# Altium PCB TestBoard.PcbDoc (part 3 of 3)
Units mm, origin at the board's own origin, x right, y up, seen from the top; angles counter-clockwise.
Board outline 300 x 186 mm, 4 copper layers (Top Layer, Mid-Layer 2, Mid-Layer 1, Bottom Layer); 136 components, 264 nets, 1109 pads, 450 vias.
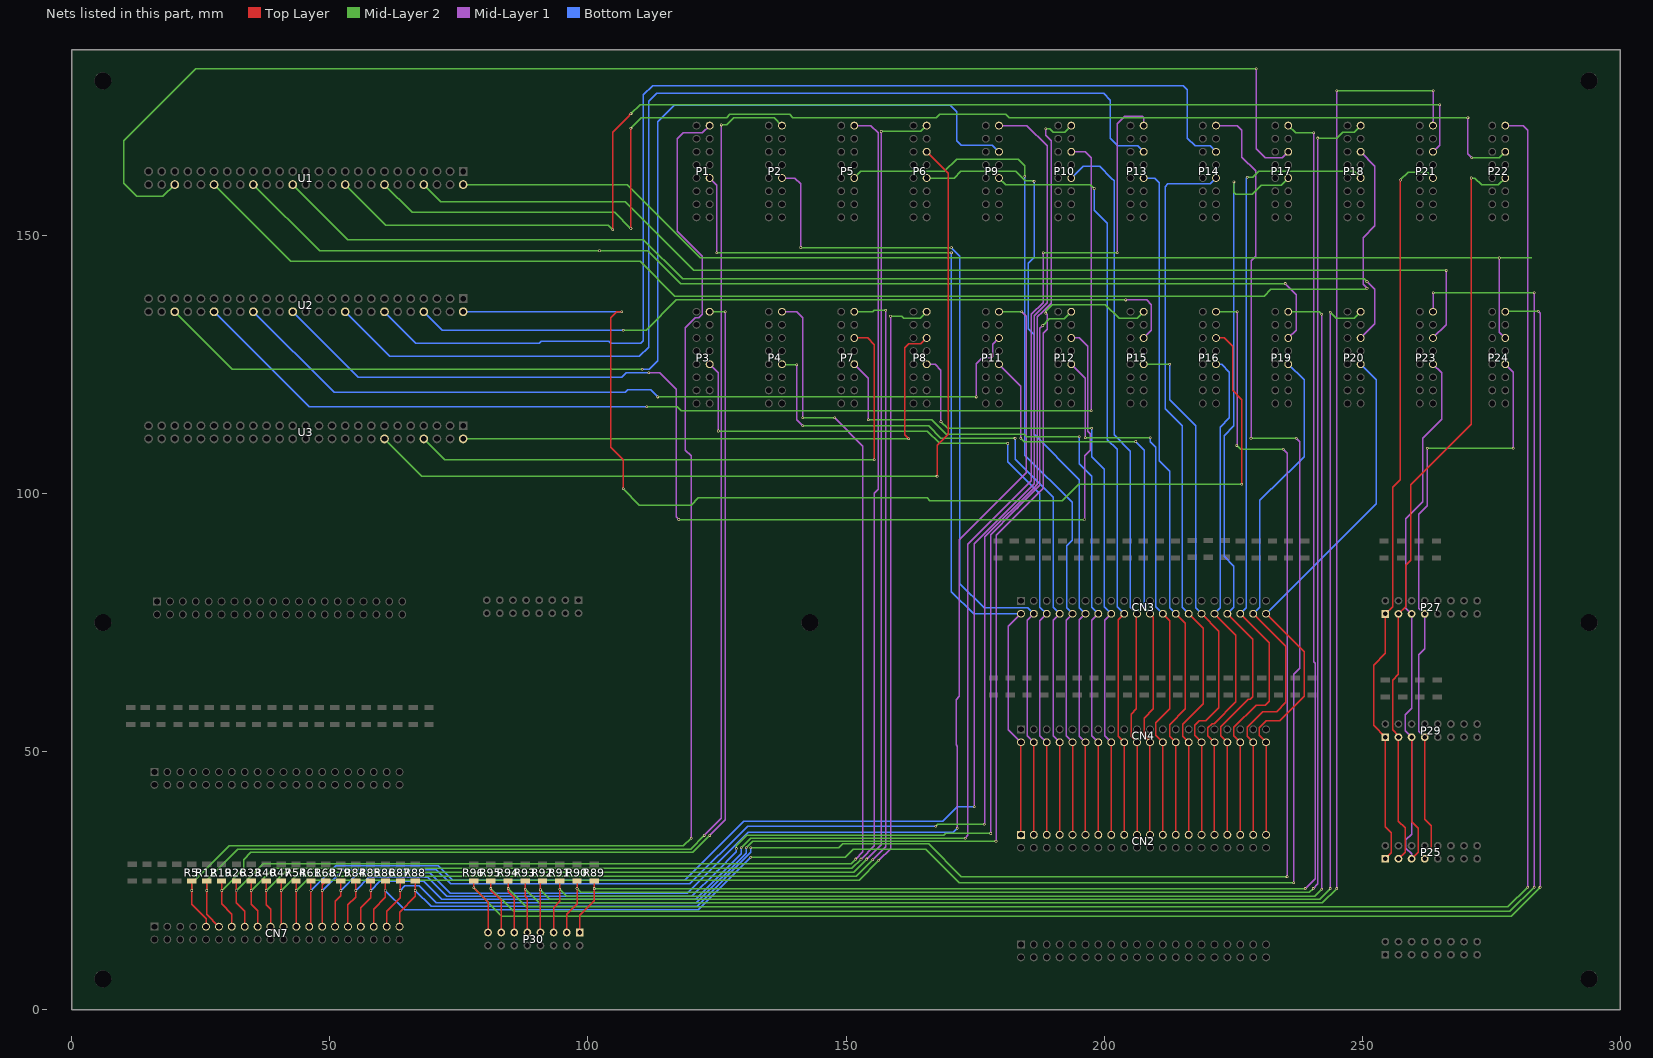
[diagram p5: the nets of this part, all layers, seen from the top]

## Via types
v1: diameter 0.508, hole 0.305, Top Layer to Bottom Layer, tented both sides, 450 vias

## Nets (pads, with @x,y where several pads share a name; then routed paths per layer and width w, separated by ;. In a path a pad name is that pad's centre, name@x,y a point inside that pad or via, vN(x,y) a via of type N, cw(c..) or ccw(c..) an arc to the next point about the centre after c; other vN are vias at no path point) (continued)
TXD0_RF6: P6.6 U3.14 | length 175.5
  Top Layer w0.254: P6.6@165.62,166.243 169.799,162.064 169.799,146.685 169.799,111.506 167.64,109.347 v1(167.64,103.378)
  Mid-Layer 2 w0.254: U3.14@60.579,110.617 67.818,103.378 v1(167.64,103.378)
TXD0_RF7: P7.6 U3.8 | length 115.7
  Top Layer w0.254: P7.6@151.603,130.175 154.178,130.175 155.448,128.905 v1(155.448,106.553)
  Mid-Layer 2 w0.254: U3.8@68.199,110.617 72.263,106.553 v1(155.448,106.553)
TXD0_RF8: P8.6 U3.2 | length 109.3
  Top Layer w0.254: v1(162.179,110.617) 161.417,111.379 161.417,128.27 162.179,129.032 164.477,129.032 P8.6@165.62,130.175
  Mid-Layer 2 w0.254: U3.2@75.819,110.617 v1(162.179,110.617)
TXD0_RF9: P9.6 U2.46 | length 221.6
  Mid-Layer 2 w0.254: U2.46@19.939,135.255 31.115,124.079 v1(110.49,124.079)
  Bottom Layer w0.254: v1(110.49,124.079) 111.887,124.079 113.538,125.73 113.538,172.085 116.713,175.26 170.18,175.26 171.45,173.99 171.45,171.831 ; 171.45,169.935 171.45,171.831 ; P9.6@179.636,166.243 178.366,167.513 172.339,167.513 171.45,168.402 171.45,171.831
TXD0_RF10: P10.6 U2.40 | length 236.4
  Mid-Layer 1 w0.254: P10.6@193.652,166.243 196.342,166.243 197.485,165.1 197.485,158.369 ; v1(197.485,116.078) 197.485,158.369 ; 197.485,159.766 197.485,158.369
  Mid-Layer 2 w0.254: v1(111.379,116.84) 117.348,116.84 118.11,116.078 v1(197.485,116.078)
  Bottom Layer w0.254: U2.40@27.559,135.255 45.974,116.84 104.648,116.84 ; 108.458,116.84 104.648,116.84 ; v1(111.379,116.84) 104.648,116.84
TXD0_RF11: P11.6 U2.34 | length 164.4
  Mid-Layer 1 w0.254: v1(175.26,118.745) 175.26,125.222 176.403,126.365 178.181,126.365 178.435,126.619 178.435,128.974 P11.6@179.636,130.175
  Mid-Layer 2 w0.254: v1(113.538,118.745) 173.101,118.745 ; v1@175.006,118.745 173.101,118.745 ; v1(175.26,118.745) 173.101,118.745
  Bottom Layer w0.254: U2.34@35.179,135.255 50.8,119.634 105.791,119.634 ; 106.68,119.634 105.791,119.634 ; v1(113.538,118.745) 113.284,118.999 113.284,119.008 112.15,120.142 107.696,120.142 107.188,119.634 105.791,119.634
TXD0_RF12: P12.6 U2.28 | length 223.4
  Mid-Layer 1 w0.254: v1(111.76,123.444) 113.919,123.444 117.094,120.269 117.094,95.504 v1(117.602,94.996) ; P12.6@193.652,130.175 195.199,130.175 196.85,128.524 196.85,113.538 196.85,112.141 197.358,111.633 197.358,108.458 196.215,107.315 v1(196.215,94.996)
  Mid-Layer 2 w0.254: v1(117.602,94.996) v1(196.215,94.996)
  Bottom Layer w0.254: U2.28@42.799,135.255 55.499,122.555 106.553,122.555 107.442,123.444 v1(111.76,123.444)
TXD0_RF13: P13.6 U2.20 | length 216.3
  Bottom Layer w0.254: U2.20@52.959,135.255 61.595,126.619 109.982,126.619 111.76,128.397 111.76,176.022 113.284,177.546 199.898,177.546 201.168,176.276 201.168,168.91 202.692,167.386 206.525,167.386 P13.6@207.668,166.243
TXD0_RF14: P14.6 U2.14 | length 223.3
  Bottom Layer w0.254: U2.14@60.579,135.255 66.675,129.159 90.551,129.159 90.932,129.54 104.013,129.54 104.394,129.159 110.236,129.159 110.744,129.667 110.744,177.292 112.522,179.07 215.392,179.07 216.154,178.308 216.154,168.91 217.678,167.386 220.541,167.386 P14.6@221.684,166.243
TXD0_RF15: P15.6 U2.8 | length 155.1
  Mid-Layer 1 w0.254: v1(204.216,137.541) 208.28,137.541 209.169,136.652 209.169,131.676 P15.6@207.668,130.175
  Mid-Layer 2 w0.254: v1(106.807,131.699) 111.252,131.699 117.094,137.541 161.29,137.541 ; 162.814,137.541 161.29,137.541 ; 188.849,137.541 187.579,137.541 ; v1(204.216,137.541) 187.579,137.541 ; 161.29,137.541 187.579,137.541
  Bottom Layer w0.254: U2.8@68.199,135.255 71.755,131.699 v1(106.807,131.699)
TXD0_RF16: P16.6 U2.2 | length 222.1
  Top Layer w0.254: v1(106.553,135.255) 105.537,135.255 104.394,134.112 104.394,108.966 106.807,106.553 v1(106.807,100.965) ; P16.6@221.684,130.175 223.266,130.175 224.917,128.524 224.917,120.015 226.695,118.237 v1(226.695,101.854)
  Mid-Layer 2 w0.254: v1(106.807,100.965) 106.807,100.956 109.973,97.79 120.015,97.79 121.412,99.187 165.695,99.187 166.203,98.679 191.897,98.679 195.072,101.854 v1(226.695,101.854)
  Bottom Layer w0.254: U2.2@75.819,135.255 v1(106.553,135.255)
TXD0_RF17: P17.6 U1.46 | length 268.3
  Mid-Layer 1 w0.254: v1(229.489,182.372) 229.489,166.878 231.267,165.1 234.557,165.1 P17.6@235.7,166.243
  Mid-Layer 2 w0.254: U1.46@19.939,159.893 17.653,157.607 12.573,157.607 10.033,160.147 10.033,168.402 24.003,182.372 v1(229.489,182.372)
TXD0_RF18: P18.6 U1.40 | length 261.8
  Mid-Layer 1 w0.254: P18.6@249.717,166.243 252.476,163.484 252.476,151.892 250.19,149.606 250.19,140.589 v1(250.952,139.827)
  Mid-Layer 2 w0.254: U1.40@27.559,159.893 42.418,145.034 110.109,145.034 116.84,138.303 231.013,138.303 232.283,139.573 250.698,139.573 v1(250.952,139.827)
TXD0_RF19: P19.6 U1.34 | length 219.9
  Mid-Layer 1 w0.254: v1(235.077,140.716) 237.236,138.557 237.236,131.711 P19.6@235.7,130.175
  Mid-Layer 2 w0.254: U1.34@35.179,159.893 48.006,147.066 v1(102.235,147.066) 111.633,147.066 117.983,140.716 v1(235.077,140.716)
TXD0_RF20: P20.6 U1.28 | length 228.6
  Mid-Layer 1 w0.254: P20.6@249.717,130.175 252.476,132.934 252.476,139.573 v1(250.952,141.097)
  Mid-Layer 2 w0.254: U1.28@42.799,159.893 53.467,149.225 110.744,149.225 118.364,141.605 250.444,141.605 v1(250.952,141.097)
TXD0_RF21: P21.6 U1.20 | length 246.5
  Top Layer w0.254: v1(104.775,151.13) 104.775,170.053 107.696,172.974 107.696,172.983 108.322,173.609 v1(108.331,173.609)
  Mid-Layer 1 w0.254: P21.6@263.733,166.243 265.049,167.559 v1(265.049,175.387)
  Mid-Layer 2 w0.254: U1.20@52.959,159.893 60.833,152.019 103.886,152.019 v1(104.775,151.13) ; v1(108.331,173.609) 110.109,175.387 v1(265.049,175.387)
TXD0_RF22: P22.6 U1.14 | length 249.8
  Top Layer w0.254: v1(108.331,151.384) v1(108.331,170.815)
  Mid-Layer 1 w0.254: v1(270.51,172.847) 270.51,165.862 v1(271.272,165.1)
  Mid-Layer 2 w0.254: U1.14@60.579,159.893 65.913,154.559 105.156,154.559 v1(108.331,151.384) ; v1(108.331,170.815) 108.34,170.815 108.966,171.441 108.966,171.45 110.363,172.847 126.873,172.847 127.508,173.482 139.065,173.482 139.7,172.847 167.513,172.847 168.148,173.482 180.975,173.482 181.61,172.847 v1(270.51,172.847) ; v1(271.272,165.1) 276.606,165.1 P22.6@277.749,166.243
TXD0_RF23: P23.6 U1.8 | length 219.2
  Mid-Layer 1 w0.254: P23.6@263.733,130.175 266.319,132.761 v1(266.319,143.256)
  Mid-Layer 2 w0.254: U1.8@68.199,159.893 71.501,156.591 107.188,156.591 120.523,143.256 v1(266.319,143.256)
TXD0_RF24: P24.6 U1.2 | length 228.9
  Mid-Layer 1 w0.254: v1(276.606,145.669) 276.606,131.318 P24.6@277.749,130.175
  Mid-Layer 2 w0.254: U1.2@75.819,159.893 107.569,159.893 121.793,145.669 v1(276.606,145.669) 282.829,145.669
VBAT_RF1: CN7.9 P1.2 R5.2 | length 259.8
  Top Layer w0.254: R5.2@23.234,24.944 v1(23.234,23.114) 23.234,20.454 26.001,17.687 CN7.9@26.001,16.109
  Mid-Layer 1 w0.254: 117.348,156.337 117.348,155.321 ; v1(120.015,33.274) 120.015,107.315 118.872,108.458 118.872,132.172 120.812,134.112 121.504,134.112 122.174,134.782 122.174,146.05 117.348,150.876 117.348,155.321 ; P1.2@123.571,171.323 122.174,169.926 118.491,169.926 117.348,168.783 117.348,155.321
  Mid-Layer 2 w0.254: v1(23.234,23.114) 23.234,24.504 30.48,31.75 118.491,31.75 v1(120.015,33.274)
VBAT_RF2: CN7.11 P2.2 R12.2 | length 264.8
  Top Layer w0.254: R12.2@26.122,24.944 v1(26.122,23.114) 26.122,18.488 CN7.11@28.501,16.109
  Mid-Layer 1 w0.254: v1(122.555,33.782) 125.857,37.084 125.857,158.877 ; 125.857,159.893 125.857,158.877 ; v1(125.857,171.45) 125.857,158.877
  Mid-Layer 2 w0.254: v1(26.122,23.114) 26.122,25.106 32.131,31.115 119.888,31.115 v1(122.555,33.782) ; v1(125.857,171.45) 126.873,171.45 128.27,172.847 136.063,172.847 P2.2@137.587,171.323
VBAT_RF3: CN7.13 P3.2 R19.2 | length 215.4
  Top Layer w0.254: R19.2@29.009,24.944 v1(29.009,23.114) 29.009,20.521 31.001,18.529 CN7.13@31.001,16.109
  Mid-Layer 1 w0.254: v1(123.571,33.782) 126.619,36.83 v1(126.619,135.255)
  Mid-Layer 2 w0.254: v1(29.009,23.114) 33.274,27.379 33.274,29.083 34.671,30.48 120.269,30.48 v1(123.571,33.782) ; P3.2@123.571,135.255 v1(126.619,135.255)
VBAT_RF4: CN7.15 P4.2 R26.2 | length 251
  Top Layer w0.254: R26.2@31.897,24.944 v1(31.897,23.114) 31.897,20.701 33.501,19.097 CN7.15@33.501,16.109
  Mid-Layer 1 w0.254: P4.2@137.587,135.255 140.462,135.255 140.957,134.76 ; 140.589,135.128 140.957,134.76 ; v1(141.605,114.681) 141.605,134.112 140.957,134.76 ; v1(147.828,114.681) 153.289,109.22 153.289,30.607 v1(151.892,29.21)
  Mid-Layer 2 w0.254: v1(31.897,23.114) 37.104,28.321 151.003,28.321 v1(151.892,29.21) ; v1(141.605,114.681) v1(147.828,114.681)
VBAT_RF5: CN7.17 P5.2 R33.2 | length 277.3
  Top Layer w0.254: R33.2@34.785,24.944 v1(34.785,23.114) 34.785,20.447 36.001,19.231 CN7.17@36.001,16.109
  Mid-Layer 1 w0.254: P5.2@151.603,171.323 154.813,171.323 156.21,169.926 156.21,100.838 155.448,100.076 155.448,95.758 155.448,31.75 v1(152.908,29.21)
  Mid-Layer 2 w0.254: v1(34.785,23.114) 39.103,27.432 151.13,27.432 v1(152.908,29.21)
VBAT_RF6: CN7.19 P6.2 R40.2 | length 279.5
  Top Layer w0.254: R40.2@37.672,24.944 v1(37.672,23.114) 37.672,20.32 38.501,19.491 CN7.19@38.501,16.109
  Mid-Layer 1 w0.254: v1(154.051,29.21) 156.845,32.004 v1(156.845,170.18)
  Mid-Layer 2 w0.254: v1(37.672,23.114) 41.228,26.67 151.511,26.67 v1(154.051,29.21) ; v1(156.845,170.18) 164.477,170.18 P6.2@165.62,171.323
VBAT_RF7: CN7.21 P7.2 R47.2 | length 239.8
  Top Layer w0.254: R47.2@40.56,24.944 v1(40.56,23.114) 40.56,16.55 CN7.21@41.001,16.109
  Mid-Layer 1 w0.254: v1(155.194,29.083) 157.734,31.623 157.734,134.493 v1(157.734,135.509)
  Mid-Layer 2 w0.254: v1(40.56,23.114) 43.354,25.908 152.019,25.908 v1(155.194,29.083) ; P7.2@151.603,135.255 155.194,135.255 155.448,135.509 v1(157.734,135.509)
VBAT_RF8: CN7.23 P8.2 R54.2 | length 238.2
  Top Layer w0.254: R54.2@43.447,24.944 v1(43.447,23.114) 43.447,16.163 CN7.23@43.501,16.109
  Mid-Layer 1 w0.254: v1(156.337,28.956) 158.623,31.242 v1(158.623,134.366)
  Mid-Layer 2 w0.254: v1(43.447,23.114) 45.479,25.146 152.527,25.146 v1(156.337,28.956) ; v1(158.623,134.366) 160.782,134.366 161.163,133.985 164.35,133.985 P8.2@165.62,135.255
VBAT_RF9: CN7.25 P9.2 R61.2 | length 292
  Top Layer w0.254: CN7.25@46.001,16.109 46.335,16.443 v1(46.335,23.114) R61.2@46.335,24.944
  Mid-Layer 1 w0.254: v1(174.879,39.37) 174.879,90.337 186.436,101.894 186.436,130.556 ; P9.2@179.636,171.323 185.039,171.323 188.976,167.386 188.976,136.989 186.436,134.449 186.436,130.556 ; 186.436,131.191 186.436,130.556
  Bottom Layer w0.254: v1(46.335,23.114) 51.161,27.94 70.993,27.94 73.787,25.146 118.745,25.146 130.175,36.576 168.783,36.576 171.577,39.37 v1(174.879,39.37)
VBAT_RF10: CN7.27 P10.2 R68.2 | length 291.6
  Top Layer w0.254: CN7.27@48.501,16.109 v1(48.501,23.114) 48.501,24.222 R68.2@49.223,24.944
  Mid-Layer 1 w0.254: v1(176.784,35.941) 176.911,36.068 176.911,91.65 186.458,101.197 ; 186.648,101.388 186.458,101.197 ; v1(188.722,170.688) 188.722,169.418 189.738,168.402 189.738,136.915 188.087,135.264 188.087,135.255 187.071,134.239 187.071,101.81 186.458,101.197
  Mid-Layer 2 w0.254: v1(167.386,35.56) 167.767,35.941 v1(176.784,35.941) ; v1(188.722,170.688) 189.484,170.688 190.119,170.053 192.382,170.053 P10.2@193.652,171.323
  Bottom Layer w0.254: v1(48.501,23.114) 52.565,27.178 70.612,27.178 73.406,24.384 119.761,24.384 130.937,35.56 v1(167.386,35.56)
VBAT_RF11: CN7.29 P11.2 R79.2 | length 247.6
  Top Layer w0.254: CN7.29@51.001,16.109 51.001,21.029 52.11,22.138 v1(52.11,23.114) R79.2@52.11,24.944
  Mid-Layer 1 w0.254: v1(171.577,35.179) 171.577,51.054 171.323,51.308 171.323,60.071 171.958,60.706 171.958,91.059 184.912,104.013 184.912,134.366 v1(184.023,135.255)
  Mid-Layer 2 w0.254: P11.2@179.636,135.255 v1(184.023,135.255)
  Bottom Layer w0.254: v1(52.11,23.114) 55.539,26.543 69.342,26.543 73.279,22.606 119.244,22.606 131.055,34.417 170.815,34.417 v1(171.577,35.179)
VBAT_RF12: CN7.31 P12.2 R84.2 | length 253.9
  Top Layer w0.254: CN7.31@53.501,16.109 53.501,20.354 54.998,21.851 v1(54.998,23.114) R84.2@54.998,24.944
  Mid-Layer 1 w0.254: v1(178.054,34.163) 178.054,89.154 ; 178.054,91.567 178.054,89.154 ; 183.388,97.409 182.626,96.647 ; v1(188.087,132.588) 187.579,132.08 187.579,101.6 182.626,96.647 ; 178.054,89.154 178.054,92.075 182.626,96.647
  Mid-Layer 2 w0.254: v1(128.778,31.242) 128.778,31.75 130.81,33.782 168.91,33.782 169.291,34.163 v1(178.054,34.163) ; v1(188.087,132.588) 189.357,133.858 192.255,133.858 P12.2@193.652,135.255
  Bottom Layer w0.254: v1(54.998,23.114) 57.538,25.654 68.961,25.654 72.644,21.971 120.142,21.971 124.841,26.67 ; 125.095,26.924 124.841,26.67 ; v1(128.778,31.242) 128.778,30.607 124.841,26.67
VBAT_RF13: CN7.33 P13.2 R85.2 | length 300.7
  Top Layer w0.254: CN7.33@56.001,16.109 56.001,19.806 57.885,21.69 v1(57.885,23.114) R85.2@57.885,24.944
  Mid-Layer 1 w0.254: v1(173.101,33.274) 173.609,33.782 173.609,90.17 185.928,102.489 185.928,134.747 188.214,137.033 188.214,145.288 ; 188.214,145.796 188.214,145.288 ; v1(188.214,146.685) 188.214,145.288 ; v1(202.565,146.685) 202.565,171.681 203.985,173.101 207.391,173.101 207.668,172.824 P13.2@207.668,171.323
  Mid-Layer 2 w0.254: v1(129.667,31.369) 131.572,33.274 v1(173.101,33.274) ; v1(188.214,146.685) 190.373,146.685 ; 189.103,146.685 190.373,146.685 ; v1(202.565,146.685) 190.373,146.685
  Bottom Layer w0.254: v1(57.885,23.114) 59.663,24.892 68.199,24.892 71.628,21.463 120.904,21.463 129.667,30.226 v1(129.667,31.369)
VBAT_RF14: CN7.35 P14.2 R86.2 | length 356.9
  Top Layer w0.254: CN7.35@58.501,16.109 58.501,19.512 60.773,21.784 v1(60.773,23.114) R86.2@60.773,24.944
  Mid-Layer 1 w0.254: P14.2@221.684,171.323 225.806,171.323 226.695,170.434 226.695,165.227 229.362,162.56 229.362,146.05 228.473,145.161 v1(228.473,110.744) ; v1(236.728,24.638) 236.728,65.024 237.871,66.167 237.871,110.109 v1(237.236,110.744)
  Mid-Layer 2 w0.254: v1(131.572,29.591) 149.86,29.591 151.384,31.115 165.481,31.115 171.958,24.638 v1(236.728,24.638) ; v1(228.473,110.744) v1(237.236,110.744)
  Bottom Layer w0.254: v1(60.773,23.114) 64.456,19.431 121.412,19.431 v1(131.572,29.591)
VBAT_RF15: CN7.37 P15.2 R87.2 | length 261.6
  Top Layer w0.254: CN7.37@61.001,16.109 61.001,19.091 63.66,21.75 v1(63.66,23.114) R87.2@63.66,24.944
  Mid-Layer 1 w0.254: v1(179.07,32.639) 179.07,91.948 188.214,101.092 188.214,131.064 188.976,131.826 188.976,134.747 v1(188.722,135.001)
  Mid-Layer 2 w0.254: v1@130.683,31.378 131.944,32.639 170.561,32.639 ; 171.45,32.639 170.561,32.639 ; v1(179.07,32.639) 170.561,32.639 ; v1(188.722,135.001) 188.722,135.382 189.992,136.652 200.279,136.652 202.946,133.985 206.398,133.985 P15.2@207.668,135.255
  Bottom Layer w0.254: v1(63.66,23.114) 64.549,24.003 67.31,24.003 70.612,20.701 121.031,20.701 130.683,30.353 v1(130.683,31.369)
VBAT_RF16: CN7.39 P16.2 R88.2 | length 310.9
  Top Layer w0.254: CN7.39@63.501,16.109 63.501,18.924 66.548,21.971 v1(66.548,23.114) R88.2@66.548,24.944
  Mid-Layer 1 w0.254: v1(225.679,109.347) 225.806,109.474 v1(225.806,135.255) ; v1(234.696,108.585) 235.458,107.823 v1(235.458,25.781)
  Mid-Layer 2 w0.254: v1(131.572,31.369) 148.59,31.369 149.352,32.131 165.989,32.131 172.339,25.781 v1(235.458,25.781) ; P16.2@221.684,135.255 v1(225.806,135.255) ; v1(225.679,109.347) 226.441,108.585 v1(234.696,108.585)
  Bottom Layer w0.254: v1(66.548,23.114) 69.596,20.066 121.149,20.066 131.572,30.489 v1(131.572,31.369)
VBAT_RF17: P17.2 P30.1 R89.2 | length 301.8
  Top Layer w0.254: P30.1@98.425,14.986 98.425,18.288 101.219,21.082 v1(101.219,23.495) R89.2@101.219,24.944
  Mid-Layer 1 w0.254: v1(239.014,23.495) 240.919,25.4 240.919,67.192 240.665,67.446 v1(240.665,169.926)
  Mid-Layer 2 w0.254: v1(101.219,23.495) v1(239.014,23.495) ; P17.2@235.7,171.323 237.097,169.926 v1(240.665,169.926)
VBAT_RF18: P18.2 P30.2 R90.2 | length 309.1
  Top Layer w0.254: P30.2@95.885,14.986 95.885,18.542 97.881,20.538 v1(97.881,23.495) R90.2@97.881,24.944
  Mid-Layer 1 w0.254: v1(240.538,23.495) 241.427,24.384 v1(241.427,168.91)
  Mid-Layer 2 w0.254: v1(97.881,23.495) 98.643,22.733 239.776,22.733 v1(240.538,23.495) ; v1(241.427,168.91) 245.11,168.91 246.253,170.053 248.447,170.053 P18.2@249.717,171.323
VBAT_RF19: P19.2 P30.3 R91.2 | length 277.3
  Top Layer w0.254: P30.3@93.345,14.986 93.345,19.812 94.542,21.009 v1(94.542,23.368) R91.2@94.542,24.944
  Mid-Layer 1 w0.254: v1(242.189,23.368) v1(242.189,134.747)
  Mid-Layer 2 w0.254: v1(94.542,23.368) 95.939,21.971 240.792,21.971 v1(242.189,23.368) ; P19.2@235.7,135.255 241.681,135.255 v1(242.189,134.747)
VBAT_RF20: P20.2 P30.4 R92.2 | length 283.2
  Top Layer w0.254: P30.4@90.805,14.986 v1(90.805,23.241) 90.805,24.545 R92.2@91.204,24.944
  Mid-Layer 1 w0.254: v1(243.84,23.495) v1(243.84,135.128)
  Mid-Layer 2 w0.254: v1(90.805,23.241) 92.583,21.463 241.808,21.463 v1(243.84,23.495) ; v1(243.84,135.128) 244.983,133.985 248.447,133.985 P20.2@249.717,135.255
VBAT_RF21: P21.2 P30.5 R93.2 | length 350.1
  Top Layer w0.254: R93.2@87.866,24.944 v1(87.866,23.368) 87.866,21.989 88.265,21.59 P30.5@88.265,14.986
  Mid-Layer 1 w0.254: v1(245.11,23.495) 245.11,111.887 ; 245.11,112.395 245.11,111.887 ; v1(245.11,178.054) 245.11,111.887 ; P21.2@263.733,171.323 263.779,171.369 v1(263.779,178.054)
  Mid-Layer 2 w0.254: v1(87.866,23.368) 90.533,20.701 242.316,20.701 v1(245.11,23.495) ; v1(245.11,178.054) v1(263.779,178.054)
VBAT_RF22: P22.2 P30.6 R94.2 | length 362.4
  Top Layer w0.254: R94.2@84.528,24.944 v1(84.528,23.495) 84.528,22.914 85.725,21.717 P30.6@85.725,14.986
  Mid-Layer 1 w0.254: P22.2@277.749,171.323 281.178,171.323 282.067,170.434 v1(282.067,23.749)
  Mid-Layer 2 w0.254: v1(84.528,23.495) 88.084,19.939 278.257,19.939 v1(282.067,23.749)
VBAT_RF23: P23.2 P30.7 R95.2 | length 355.2
  Top Layer w0.254: R95.2@81.189,24.944 v1(81.189,23.495) 81.189,23.205 83.185,21.209 P30.7@83.185,14.986
  Mid-Layer 1 w0.254: P23.2@263.733,135.255 263.779,135.301 v1(263.779,138.938) ; v1(283.337,23.749) v1(283.337,138.938)
  Mid-Layer 2 w0.254: v1(81.189,23.495) 85.634,19.05 278.638,19.05 v1(283.337,23.749) ; v1(263.779,138.938) v1(283.337,138.938)
VBAT_RF24: P24.2 P30.8 R96.2 | length 340.5
  Top Layer w0.254: R96.2@77.851,24.944 v1(77.851,23.622) 80.645,20.828 P30.8@80.645,14.986
  Mid-Layer 1 w0.254: v1(284.099,135.382) 284.48,135.001 v1(284.48,23.749)
  Mid-Layer 2 w0.254: v1(77.851,23.622) 83.312,18.161 278.892,18.161 v1(284.48,23.749) ; P24.2@277.749,135.255 277.876,135.382 v1(284.099,135.382)
VCC_RF_RF1: CN2.1 CN3.2 CN4.2 P1.10 | length 186.4
  Top Layer w0.254: CN2.1@183.895,33.889 CN4.2@183.895,51.829
  Mid-Layer 1 w0.254: P1.10@123.571,161.163 124.968,159.766 v1(124.968,146.685) ; CN4.2@183.895,51.829 181.483,54.241 181.483,74.316 CN3.2@183.895,76.728
  Mid-Layer 2 w0.254: v1(124.968,146.685) v1(170.434,146.685)
  Bottom Layer w0.254: v1@170.434,146.558 v1(170.434,146.685) 170.434,81.026 174.732,76.728 CN3.2@183.895,76.728
VCC_RF_RF2: CN2.3 CN3.4 CN4.4 P2.10 | length 172.1
  Top Layer w0.254: CN2.3@186.395,33.889 CN4.4@186.395,51.829
  Mid-Layer 1 w0.254: P2.10@137.587,161.163 140.081,161.163 141.224,160.02 v1(141.224,147.701) ; CN4.4@186.395,51.829 185.166,53.058 185.166,75.499 CN3.4@186.395,76.728
  Mid-Layer 2 w0.254: v1(141.224,147.701) v1(170.434,147.701)
  Bottom Layer w0.254: v1(170.434,147.701) 172.085,146.05 172.085,82.55 176.764,77.871 185.252,77.871 CN3.4@186.395,76.728
VCC_RF_RF3: CN2.5 CN3.6 CN4.6 P3.10 | length 150.8
  Top Layer w0.254: CN2.5@188.895,33.889 CN4.6@188.895,51.829
  Mid-Layer 1 w0.254: P3.10@123.571,125.095 125.222,123.444 v1(125.222,112.141) ; CN4.6@188.895,51.829 187.579,53.145 187.579,75.412 CN3.6@188.895,76.728
  Mid-Layer 2 w0.254: v1(125.222,112.141) 165.735,112.141 168.148,109.728 v1(181.356,109.728)
  Bottom Layer w0.254: v1(181.356,109.728) 181.356,106.172 187.579,99.949 187.579,78.044 CN3.6@188.895,76.728
VCC_RF_RF4: CN2.7 CN3.8 CN4.8 P4.10 | length 138.9
  Top Layer w0.254: CN2.7@191.395,33.889 CN4.8@191.395,51.829
  Mid-Layer 1 w0.254: v1(140.462,124.968) 140.462,114.3 v1(141.605,113.157) ; CN4.8@191.395,51.829 190.119,53.105 190.119,75.452 CN3.8@191.395,76.728
  Mid-Layer 2 w0.254: P4.10@137.587,125.095 137.714,124.968 v1(140.462,124.968) ; v1(141.605,113.157) 165.989,113.157 168.402,110.744 v1(182.753,110.744)
  Bottom Layer w0.254: v1(182.753,110.744) 182.753,106.68 190.119,99.314 190.119,78.004 CN3.8@191.395,76.728
VCC_RF_RF5: CN2.9 CN3.10 CN4.10 P5.10 | length 170.5
  Top Layer w0.254: CN2.9@193.895,33.889 CN4.10@193.895,51.829
  Mid-Layer 1 w0.254: CN4.10@193.895,51.829 192.659,53.065 192.659,75.492 CN3.10@193.895,76.728
  Mid-Layer 2 w0.254: P5.10@151.603,161.163 152.873,162.433 169.037,162.433 171.45,164.846 183.388,164.846 184.658,163.576 v1(184.658,161.544)
  Bottom Layer w0.254: v1(184.658,161.544) 184.658,107.442 193.802,98.298 193.802,90.932 192.786,89.916 192.786,79.769 192.752,79.735 192.752,77.871 CN3.10@193.895,76.728
VCC_RF_RF6: CN2.11 CN3.12 CN4.12 P6.10 | length 154.8
  Top Layer w0.254: CN2.11@196.395,33.889 CN4.12@196.395,51.829
  Mid-Layer 1 w0.254: CN4.12@196.395,51.829 195.199,53.025 195.199,75.532 CN3.12@196.395,76.728
  Mid-Layer 2 w0.254: P6.10@165.62,161.163 170.942,161.163 172.212,162.433 182.88,162.433 184.023,161.29 184.023,161.281 184.712,160.591 185.737,160.591 186.373,160.591 v1(186.436,160.528)
  Bottom Layer w0.254: v1(186.436,160.528) 186.436,145.796 185.293,144.653 185.293,131.953 186.436,130.81 186.436,111.506 195.199,102.743 195.199,77.924 CN3.12@196.395,76.728
VCC_RF_RF7: CN2.13 CN3.14 CN4.14 P7.10 | length 133.9
  Top Layer w0.254: CN2.13@198.895,33.889 CN4.14@198.895,51.829
  Mid-Layer 1 w0.254: P7.10@151.603,125.095 154.305,122.393 v1(154.305,114.3) ; CN4.14@198.895,51.829 197.612,53.112 197.612,75.445 CN3.14@198.895,76.728
  Mid-Layer 2 w0.254: v1(154.305,114.3) 166.624,114.3 169.418,111.506 184.531,111.506 185.039,110.998 v1(195.199,110.998)
  Bottom Layer w0.254: v1(195.199,110.998) 195.199,105.791 197.612,103.378 197.612,78.011 CN3.14@198.895,76.728
VCC_RF_RF8: CN2.15 CN3.16 CN4.16 P8.10 | length 124.4
  Top Layer w0.254: CN2.15@201.395,33.889 CN4.16@201.395,51.829
  Mid-Layer 1 w0.254: P8.10@165.62,125.095 167.259,125.095 168.402,123.952 v1(168.402,113.919) ; CN4.16@201.395,51.829 200.152,53.072 200.152,75.485 CN3.16@201.395,76.728
  Mid-Layer 2 w0.254: v1(168.402,113.919) 169.672,112.649 v1(197.612,112.649)
  Bottom Layer w0.254: v1(197.612,112.649) 197.612,107.188 200.025,104.775 200.025,79.728 200.038,79.714 200.038,78.085 CN3.16@201.395,76.728
VCC_RF_RF9: CN2.17 CN3.18 CN4.18 P9.10 | length 147.9
  Top Layer w0.254: CN2.17@203.895,33.889 CN4.18@203.895,51.829 202.752,52.972 202.752,75.585 CN3.18@203.895,76.728
  Mid-Layer 2 w0.254: P9.10@179.636,161.163 180.906,159.893 197.358,159.893 v1(198.12,159.131)
  Bottom Layer w0.254: v1(198.12,159.131) 198.12,154.94 200.66,152.4 200.66,110.49 202.565,108.585 202.565,78.058 CN3.18@203.895,76.728
VCC_RF_RF10: CN2.19 CN3.20 CN4.20 P10.10 | length 140.1
  Top Layer w0.254: CN2.19@206.395,33.889 CN4.20@206.395,51.829 205.232,52.992 205.232,57.277 206.248,58.293 206.248,76.581 CN3.20@206.395,76.728
  Bottom Layer w0.254: P10.10@193.652,161.163 195.938,163.449 199.136,163.449 201.422,161.163 ; 201.295,161.29 201.422,161.163 ; CN3.20@206.395,76.728 205.105,78.018 205.105,108.204 201.93,111.379 201.93,160.655 201.422,161.163
VCC_RF_RF11: CN2.21 CN3.22 CN4.22 P11.10 | length 117.5
  Top Layer w0.254: CN2.21@208.895,33.889 CN4.22@208.895,51.829 208.895,52.043 207.752,53.186 207.752,56.495 209.55,58.293 209.55,76.073 CN3.22@208.895,76.728
  Mid-Layer 1 w0.254: P11.10@179.636,125.095 183.896,120.835 v1(183.896,110.744)
  Mid-Layer 2 w0.254: v1(183.896,110.744) 184.531,110.109 v1(206.121,110.109)
  Bottom Layer w0.254: v1(206.121,110.109) 207.772,108.458 207.772,79.741 207.752,79.721 207.752,77.871 CN3.22@208.895,76.728
VCC_RF_RF12: CN2.23 CN3.24 CN4.24 P12.10 | length 108.1
  Top Layer w0.254: CN2.23@211.395,33.889 CN4.24@211.395,51.829 210.058,53.166 210.058,55.626 212.725,58.293 212.725,75.398 CN3.24@211.395,76.728
  Mid-Layer 1 w0.254: P12.10@193.652,125.095 196.342,122.405 v1(196.342,110.871)
  Mid-Layer 2 w0.254: v1(196.342,110.871) v1(208.915,110.871)
  Bottom Layer w0.254: v1(208.915,110.871) 208.915,110.109 210.058,108.966 210.058,78.065 CN3.24@211.395,76.728
VCC_RF_RF13: CN2.25 CN3.26 CN4.26 P13.10 | length 133.6
  Top Layer w0.254: CN2.25@213.895,33.889 CN4.26@213.895,51.829 212.725,52.999 212.725,55.245 215.773,58.293 215.773,74.85 CN3.26@213.895,76.728
  Bottom Layer w0.254: P13.10@207.668,161.163 209.804,161.163 210.693,160.274 210.693,106.426 212.725,104.394 212.725,77.898 CN3.26@213.895,76.728
VCC_RF_RF14: CN2.27 CN3.28 CN4.28 P14.10 | length 141.3
  Top Layer w0.254: CN2.27@216.395,33.889 CN4.28@216.395,51.829 215.252,52.972 215.252,55.359 219.202,59.309 219.202,73.921 CN3.28@216.395,76.728
  Bottom Layer w0.254: CN3.28@216.395,76.728 215.138,77.985 215.138,113.157 211.836,116.459 211.836,159.512 212.344,160.02 220.541,160.02 P14.10@221.684,161.163
VCC_RF_RF15: CN2.29 CN3.30 CN4.30 P15.10 | length 103.5
  Top Layer w0.254: CN2.29@218.895,33.889 CN4.30@218.895,51.829 217.551,53.173 217.551,55.118 218.44,56.007 219.71,56.007 222.25,58.547 222.25,73.373 CN3.30@218.895,76.728
  Mid-Layer 2 w0.254: P15.10@207.668,125.095 v1(212.725,125.095)
  Bottom Layer w0.254: v1(212.725,125.095) 212.725,118.237 217.805,113.157 217.805,79.807 217.752,79.754 217.752,77.871 CN3.30@218.895,76.728
VCC_RF_RF16: CN2.31 CN3.32 CN4.32 P16.10 | length 98.9
  Top Layer w0.254: CN2.31@221.395,33.889 CN4.32@221.395,51.829 220.091,53.133 220.091,54.642 220.922,55.472 221.334,55.472 225.552,59.69 225.552,72.571 CN3.32@221.395,76.728
  Bottom Layer w0.254: CN3.32@221.395,76.728 222.538,77.871 222.538,79.735 222.504,79.769 222.504,112.903 224.282,114.681 224.282,123.571 222.758,125.095 P16.10@221.684,125.095
VCC_RF_RF17: CN2.33 CN3.34 CN4.34 P17.10 | length 148.1
  Top Layer w0.254: CN2.33@223.895,33.889 CN4.34@223.895,51.829 222.631,53.093 222.631,54.847 227.915,60.131 228.348,60.131 228.854,60.637 228.854,71.769 CN3.34@223.895,76.728
  Mid-Layer 2 w0.254: v1(225.171,160.401) 225.171,158.369 225.552,157.988 228.727,157.988 230.505,159.766 234.303,159.766 P17.10@235.7,161.163
  Bottom Layer w0.254: CN3.34@223.895,76.728 225.171,78.004 225.171,85.979 223.266,87.884 223.266,111.252 225.171,113.157 v1(225.171,160.401)
VCC_RF_RF18: CN2.35 CN3.36 CN4.36 P18.10 | length 157.7
  Top Layer w0.254: CN2.35@226.395,33.889 CN4.36@226.395,51.829 225.171,53.053 225.171,54.737 229.489,59.055 231.267,59.055 232.029,59.817 232.029,71.094 CN3.36@226.395,76.728
  Mid-Layer 2 w0.254: v1(227.711,161.29) 228.854,161.29 229.997,162.433 248.447,162.433 P18.10@249.717,161.163
  Bottom Layer w0.254: CN3.36@226.395,76.728 227.584,77.917 227.584,161.163 v1(227.711,161.29)
VCC_RF_RF19: CN2.37 CN3.38 CN4.38 P19.10 | length 104.4
  Top Layer w0.254: CN2.37@228.895,33.889 CN4.38@228.895,51.829 227.711,53.013 227.711,54.762 230.734,57.785 233.426,57.785 235.204,59.563 235.204,70.419 CN3.38@228.895,76.728
  Bottom Layer w0.254: CN3.38@228.895,76.728 230.124,77.957 230.124,98.688 232.401,100.965 232.537,100.965 238.76,107.188 238.76,122.035 P19.10@235.7,125.095
VCC_RF_RF20: CN2.39 CN3.40 CN4.40 P20.10 | length 110.1
  Top Layer w0.254: CN2.39@231.395,33.889 CN4.40@231.395,51.829 230.038,53.186 230.038,54.651 231.394,56.007 234.061,56.007 238.76,60.706 238.76,69.363 CN3.40@231.395,76.728
  Bottom Layer w0.254: CN3.40@231.395,76.728 252.73,98.063 252.73,122.082 P20.10@249.717,125.095
VCC_RF_RF21: P21.10 P25.1 P27.1 P29.1 | length 143
  Top Layer w0.254: P25.1@254.508,29.252 255.651,30.395 255.651,34.29 254.508,35.433 P29.1@254.508,52.832 252.222,55.118 252.222,66.802 254.508,69.088 P27.1@254.508,76.708 255.905,78.105 255.905,101.219 257.429,102.743 v1(257.429,160.782)
  Mid-Layer 2 w0.254: v1(257.429,160.782) 258.953,162.306 262.59,162.306 P21.10@263.733,161.163
VCC_RF_RF22: P22.10 P25.2 P27.2 P29.2 | length 147.5
  Top Layer w0.254: P25.2@257.048,29.252 258.318,30.522 258.318,35.306 257.048,36.576 P29.2@257.048,52.832 257.048,53.11 255.917,54.241 255.917,63.884 257.048,65.015 P27.2@257.048,76.708 258.445,78.105 258.445,86.106 259.461,87.122 259.461,101.727 271.145,113.411 v1(271.145,161.163)
  Mid-Layer 2 w0.254: v1(271.145,161.163) 271.856,161.163 273.202,159.817 276.403,159.817 P22.10@277.749,161.163
VCC_RF_RF23: P23.10 P25.3 P27.3 P29.3 | length 126.5
  Top Layer w0.254: P25.3@259.588,29.252 260.858,30.522 260.858,35.179 259.588,36.449 P29.3@259.588,52.832
  Mid-Layer 1 w0.254: P25.3@259.588,29.252 259.588,30.193 258.457,31.324 258.457,32.923 259.588,34.054 P29.3@259.588,52.832 258.318,54.102 258.318,57.15 259.588,58.42 P27.3@259.588,76.708 258.445,77.851 258.445,95.123 261.747,98.425 261.747,110.744 265.43,114.427 265.43,123.398 P23.10@263.733,125.095
VCC_RF_RF24: P24.10 P25.4 P27.4 P29.4 | length 116.3
  Top Layer w0.254: P25.4@262.128,29.252 263.398,30.522 263.398,35.687 262.128,36.957 P29.4@262.128,52.832
  Mid-Layer 1 w0.254: P29.4@262.128,52.832 260.985,53.975 260.985,68.834 262.128,69.977 P27.4@262.128,76.708 260.985,77.851 260.985,96.012 262.636,97.663 v1(262.636,108.839) ; P24.10@277.749,125.095 279.273,123.571 v1(279.273,108.839)
  Mid-Layer 2 w0.254: v1(262.636,108.839) v1(279.273,108.839)
pads on no net: P1.3 P1.4 P1.7 P1.8 P1.11 P1.12 P1.16 P2.3 P2.4 P2.7 P2.8 P2.11 P2.12 P2.16 P3.3 P3.4 P3.7 P3.8 P3.11 P3.12 P3.16 P4.3 P4.4 P4.7 P4.8 P4.11 P4.12 P4.16 P5.3 P5.4 P5.7 P5.8 P5.11 P5.12 P5.16 P6.3 P6.4 P6.7 P6.8 P6.11 P6.12 P6.16 P7.3 P7.4 P7.7 P7.8 P7.11 P7.12 P7.16 P8.3 P8.4 P8.7 P8.8 P8.11 P8.12 P8.16 P9.3 P9.4 P9.7 P9.8 P9.11 P9.12 P9.16 P10.3 P10.4 P10.7 P10.8 P10.11 P10.12 P10.16 P11.3 P11.4 P11.7 P11.8 P11.11 P11.12 P11.16 P12.3 P12.4 P12.7 P12.8 P12.11 P12.12 P12.16 P13.3 P13.4 P13.7 P13.8 P13.11 P13.12 P13.16 P14.3 P14.4 P14.7 P14.8 P14.11 P14.12 P14.16 P15.3 P15.4 P15.7 P15.8 P15.11 P15.12 P15.16 P16.3 P16.4 P16.7 P16.8 P16.11 P16.12 P16.16 P17.3 P17.4 P17.7 P17.8 P17.11 P17.12 P17.16 P18.3 P18.4 P18.7 P18.8 P18.11 P18.12 P18.16 P19.3 P19.4 P19.7 P19.8 P19.11 P19.12 P19.16 P20.3 P20.4 P20.7 P20.8 P20.11 P20.12 P20.16 P21.3 P21.4 P21.7 P21.8 P21.11 P21.12 P21.16 P22.3 P22.4 P22.7 P22.8 P22.11 P22.12 P22.16 P23.3 P23.4 P23.7 P23.8 P23.11 P23.12 P23.16 P24.3 P24.4 P24.7 P24.8 P24.11 P24.12 P24.16 P25.5 P25.6 P25.7 P25.8 P25.13 P25.14 P25.15 P25.16 P26.5 P26.6 P26.7 P26.8 P26.13 P26.14 P26.15 P26.16 P27.5 P27.6 P27.7 P27.8 P27.13 P27.14 P27.15 P27.16 P28.5 P28.6 P28.7 P28.8 P28.13 P28.14 P28.15 P28.16 P29.5 P29.6 P29.7 P29.8 P29.13 P29.14 P29.15 P29.16 U1.1 U1.3 U1.7 U1.9 U1.13 U1.15 U1.19 U1.21 U1.25 U1.26 U1.27 U1.29 U1.33 U1.35 U1.39 U1.41 U1.45 U1.47 U2.1 U2.3 U2.7 U2.9 U2.13 U2.15 U2.19 U2.21 U2.25 U2.26 U2.27 U2.29 U2.33 U2.35 U2.39 U2.41 U2.45 U2.47 U3.1 U3.3 U3.7 U3.9 U3.13 U3.15 U3.19 U3.21 U3.25 U3.26 U3.27 U3.29 U3.33 U3.35 U3.39 U3.41 U3.45 U3.47

## Silkscreen, mask and mechanical layers (free items; w line width, h text height)
Top Overlay:
  lines w0.127: 81.915,75.438 81.915,74.295 83.566,74.295 83.566,75.438 ; 82.296,11.176 82.296,10.033 83.947,10.033 83.947,11.176 ; 94.742,75.438 94.742,74.295 96.393,74.295 96.393,75.438 ; 94.996,11.176 94.996,10.033 96.647,10.033 96.647,11.176 ; 256.286,33.062 256.286,34.205 257.937,34.205 257.937,33.062 ; 256.286,80.391 256.286,81.534 257.937,81.534 257.937,80.391 ; 256.413,14.478 256.413,15.621 258.064,15.621 258.064,14.478 ; 256.413,56.642 256.413,57.785 258.064,57.785 258.064,56.642 ; 262.001,75.184 262.001,73.787 262.509,73.279 267.716,73.279 ; 262.128,56.642 262.128,58.039 262.636,58.547 275.336,58.547 ; 262.128,80.518 262.128,83.185 263.398,84.455 267.462,84.455 ; 262.255,27.982 262.255,26.924 278.638,26.924 279.273,27.559 ; 262.255,33.062 262.255,35.56 263.144,36.449 274.574,36.449 277.749,33.274 ; 268.732,33.062 268.732,34.205 270.383,34.205 270.383,33.062 ; 268.859,14.478 268.859,15.621 270.51,15.621 270.51,14.478 ; 268.859,80.391 268.859,81.534 270.51,81.534 270.51,80.391 ; 268.986,56.642 268.986,57.785 270.637,57.785 270.637,56.642
  text "VCC24" at 70.231,170.942 h1.02 r270
  text "VCC19" at 29.464,170.815 h1.02 r270
  text "VCC20" at 37.084,170.815 h1.02 r270
  text "VCC21" at 47.498,170.815 h1.02 r270
  text "VCC23" at 62.865,170.815 h1.02 r270
  text "VCC17" at 13.966,170.684 h1.02 r270
  text "VCC18" at 21.971,170.688 h1.02 r270
  text "VCC22" at 54.864,170.688 h1.02 r270
  text "Uart1" at 82.55,160.274 h2.54
  text "G20" at 37.338,155.956 h1.02 r270
  text "RX20" at 39.878,155.956 h1.02 r270
  text "TX20" at 42.291,155.956 h1.02 r270
  text "G17" at 13.97,155.702 h1.02 r270
  text "RX17" at 16.51,155.702 h1.02 r270
  text "TX17" at 18.923,155.702 h1.02 r270
  text "G19" at 29.845,155.575 h1.02 r270
  text "RX19" at 32.385,155.575 h1.02 r270
  text "TX19" at 34.798,155.575 h1.02 r270
  text "G21" at 47.625,155.575 h1.02 r270
  text "RX21" at 50.165,155.575 h1.02 r270
  text "TX21" at 52.578,155.575 h1.02 r270
  text "G18" at 22.225,155.448 h1.02 r270
  text "RX18" at 24.765,155.448 h1.02 r270
  text "TX18" at 27.178,155.448 h1.02 r270
  text "G22" at 55.499,155.321 h1.02 r270
  text "RX22" at 58.039,155.321 h1.02 r270
  text "TX23" at 60.452,155.321 h1.02 r270
  text "G23" at 62.823,155.236 h1.02 r270
  text "RX23" at 65.363,155.236 h1.02 r270
  text "TX23" at 67.776,155.236 h1.02 r270
  text "G24" at 70.866,154.94 h1.02 r270
  text "RX24" at 73.406,154.94 h1.02 r270
  text "TX24." at 75.819,154.94 h1.02 r270
  text "VCC9" at 14.224,146.304 h1.02 r270
  text "VCC10" at 21.717,146.304 h1.02 r270
  text "VCC11" at 29.337,146.304 h1.02 r270
  text "VCC13" at 47.117,146.304 h1.02 r270
  text "VCC14" at 55.118,146.304 h1.02 r270
  text "VCC15" at 62.484,146.304 h1.02 r270
  text "VCC16" at 70.104,146.304 h1.02 r270
  text "VCC12" at 37.211,146.177 h1.02 r270
  text "Uart2" at 82.804,136.652 h2.54
  text "G9" at 14.097,131.318 h1.02 r270
  text "RX9" at 16.672,131.318 h1.02 r270
  text "TX9" at 19.246,131.318 h1.02 r270
  text "G10" at 21.821,131.318 h1.02 r270
  text "RX10" at 24.396,131.318 h1.02 r270
  text "TX10" at 26.97,131.318 h1.02 r270
  text "G11" at 29.545,131.318 h1.02 r270
  text "RX11" at 32.119,131.318 h1.02 r270
  text "TX11" at 34.694,131.318 h1.02 r270
  text "G12" at 37.269,131.318 h1.02 r270
  text "RX12" at 39.843,131.318 h1.02 r270
  text "TX12" at 42.418,131.318 h1.02 r270
  text "G13" at 47.752,130.937 h1.02 r270
  text "RX13" at 50.315,130.937 h1.02 r270
  text "TX13" at 52.878,130.937 h1.02 r270
  text "G14" at 55.441,130.937 h1.02 r270
  text "RX14" at 58.004,130.937 h1.02 r270
  text "TX14" at 60.567,130.937 h1.02 r270
  text "G15" at 63.131,130.937 h1.02 r270
  text "RX15" at 65.694,130.937 h1.02 r270
  text "TX15" at 68.257,130.937 h1.02 r270
  text "G16" at 70.82,130.937 h1.02 r270
  text "RX16" at 73.383,130.937 h1.02 r270
  text "TX16" at 75.946,130.937 h1.02 r270
  text "VCC2" at 21.971,122.047 h1.02 r270
  text "VCC3" at 29.464,122.047 h1.02 r270
  text "VCC4" at 37.084,122.047 h1.02 r270
  text "VCC5" at 47.498,122.047 h1.02 r270
  text "VCC6" at 54.864,122.047 h1.02 r270
  text "VCC7" at 62.865,122.047 h1.02 r270
  text "VCC8" at 70.231,122.047 h1.02 r270
  text "VCC1" at 13.966,121.708 h1.02 r270
  text "Uart3" at 83.693,110.363 h2.54
  text "G1" at 13.97,106.807 h1.02 r270
  text "RX1" at 16.51,106.807 h1.02 r270
  text "TX1" at 18.923,106.807 h1.02 r270
  text "G2" at 22.225,106.807 h1.02 r270
  text "RX2" at 24.765,106.807 h1.02 r270
  text "TX2" at 27.178,106.807 h1.02 r270
  text "G3" at 29.845,106.807 h1.02 r270
  text "RX3" at 32.385,106.807 h1.02 r270
  text "TX3" at 34.798,106.807 h1.02 r270
  text "G4" at 37.465,106.807 h1.02 r270
  text "RX4" at 40.005,106.807 h1.02 r270
  text "TX4" at 42.291,106.807 h1.02 r270
  text "G5" at 47.625,106.807 h1.02 r270
  text "RX5" at 50.165,106.807 h1.02 r270
  text "TX5" at 52.578,106.807 h1.02 r270
  text "G6" at 55.499,106.807 h1.02 r270
  text "RX6" at 58.039,106.807 h1.02 r270
  text "TX6" at 60.452,106.807 h1.02 r270
  text "G7" at 62.823,106.807 h1.02 r270
  text "RX7" at 65.363,106.807 h1.02 r270
  text "TX7" at 67.776,106.807 h1.02 r270
  text "G8" at 70.866,106.807 h1.02 r270
  text "RX8" at 73.406,106.807 h1.02 r270
  text "TX8" at 75.819,106.807 h1.02 r270
  text "RC_V20" at 63.627,89.281 h1.02 r270
  text "RC_V21" at 97.536,88.011 h1.02 r270
  text "RC_V24" at 90.17,87.757 h1.02 r270
  text "RO_RF24" at 268.097,83.947 h1.02
  text "RO_RF1" at 174.371,79.883 h1.02
  text "RC_V1" at 8.001,79.629 h1.02
  text "RO_RF20" at 234.569,79.375 h1.02
  text "RO_RF21" at 245.999,78.359 h1.02
  text "RCO_V1" at 7.366,76.327 h1.02
  text "RCO_RF1" at 173.99,76.073 h1.02
  text "RCO_RF21" at 244.729,75.946 h1.02
  text "RCO_RF20" at 234.569,75.819 h1.02
  text "RCO_V21" at 97.536,74.93 h1.02 r270
  text "RCO_V24" at 90.17,74.676 h1.02 r270
  text "RCO_V20" at 63.5,72.898 h1.02 r270
  text "RCO_RF24" at 268.478,72.898 h1.02
  text "RCS_RF24" at 276.606,58.293 h1.02
  text "RCS_RF21" at 244.729,55.499 h1.02
  text "RCS_RF1" at 174.752,54.737 h1.02
  text "RCS_RF20" at 234.696,53.848 h1.02
  text "CIN-_V20" at 63.627,53.594 h1.02 r270
  text "CIN-_V1" at 15.494,53.467 h1.02 r270
  text "RCOS_RF21" at 243.84,52.197 h1.02
  text "RCOS_RF1" at 173.736,51.562 h1.02
  text "RCOS_RF20" at 234.696,51.054 h1.02
  text "RCOS_RF24" at 261.493,50.927 h1.02 r270
  text "CIN+_V20" at 63.5,40.132 h1.02 r270
  text "CIN+_V1" at 15.621,40.005 h1.02 r270
  text "V+_RF1" at 175.133,34.925 h1.02
  text "V+_RF20" at 235.458,33.782 h1.02
  text "V+_RF24" at 276.352,31.877 h1.02
  text "V+_RF21" at 245.872,31.75 h1.02
  text "V_RF1" at 176.276,30.734 h1.02
  text "V_RF20" at 235.712,29.845 h1.02
  text "V_RF21" at 247.015,28.702 h1.02
  text "V-_RF24" at 276.733,27.94 h1.02
  text "CIN-_VB16" at 63.246,24.003 h1.02 r270
  text "CIN-_V21" at 15.367,23.368 h1.02 r270
  text "CIN-_V24" at 22.479,23.368 h1.02 r270
  text "CIN-_VB1" at 25.146,23.241 h1.02 r270
  text "CIN-_VB24" at 80.264,21.336 h1.02 r270
  text "CIN-_VB17" at 98.044,21.209 h1.02 r270
  text "G24" at 261.747,17.526 h1.02 r270
  text "G1" at 178.181,13.081 h1.02
  text "G20" at 234.823,12.954 h1.02
  text "G21" at 249.682,12.954 h1.02
  text "CIN+_VB24" at 80.264,10.541 h1.02 r270
  text "CIN+_VB16" at 63.5,10.16 h1.02 r270
  text "CIN+_VB17" at 98.171,10.16 h1.02 r270
  text "RST20" at 234.95,10.033 h1.02
  text "RST21" at 248.285,9.652 h1.02
  text "CIN+_24" at 22.987,9.398 h1.02 r270
  text "CIN+_VB1" at 25.4,9.398 h1.02 r270
  text "RST1" at 176.911,9.144 h1.02
  text "CIN+_21" at 15.367,8.89 h1.02 r270
  text "RST24" at 261.872,6.604 h1.02 r270
  text "IO  Board V1.0" at 106.045,3.175 h2.54
Mechanical 1:
  the board outline again, w0.508

## Text inside footprints (layer, text, board x,y; h text height)
P25: Top Overlay "8" at 274.32,28.744 h1.02 r270; Top Overlay "16" at 274.32,31.284 h1.02 r270
P26: Top Overlay "8" at 274.32,10.16 h1.02 r270; Top Overlay "16" at 274.32,12.7 h1.02 r270
P27: Top Overlay "8" at 274.32,76.2 h1.02 r270; Top Overlay "16" at 274.32,78.74 h1.02 r270
P28: Top Overlay "9" at 100.711,76.454 h1.02; Top Overlay "1" at 100.965,78.867 h1.02; Top Overlay "8" at 77.343,79.121 h1.02; Top Overlay "16" at 76.454,76.2 h1.02
P29: Top Overlay "16" at 274.32,54.864 h1.02 r270; Top Overlay "8" at 274.32,52.324 h1.02 r270
P30: Top Overlay "9" at 101.6,12.7 h1.02 r180; Top Overlay "1" at 100.965,14.859 h1.02; Top Overlay "8" at 77.724,14.605 h1.02; Top Overlay "16" at 76.835,10.922 h1.02